# EAGLE board VCF-LM358-Stereo (EAGLE 7.2.0)
Voltage-Controlled Low-Pass Filter using LM358 Dual-Opamp (Stereo) http://electro-music.com/forum/topic-45231-0.html&postdays=0&postorder=asc&highlight=
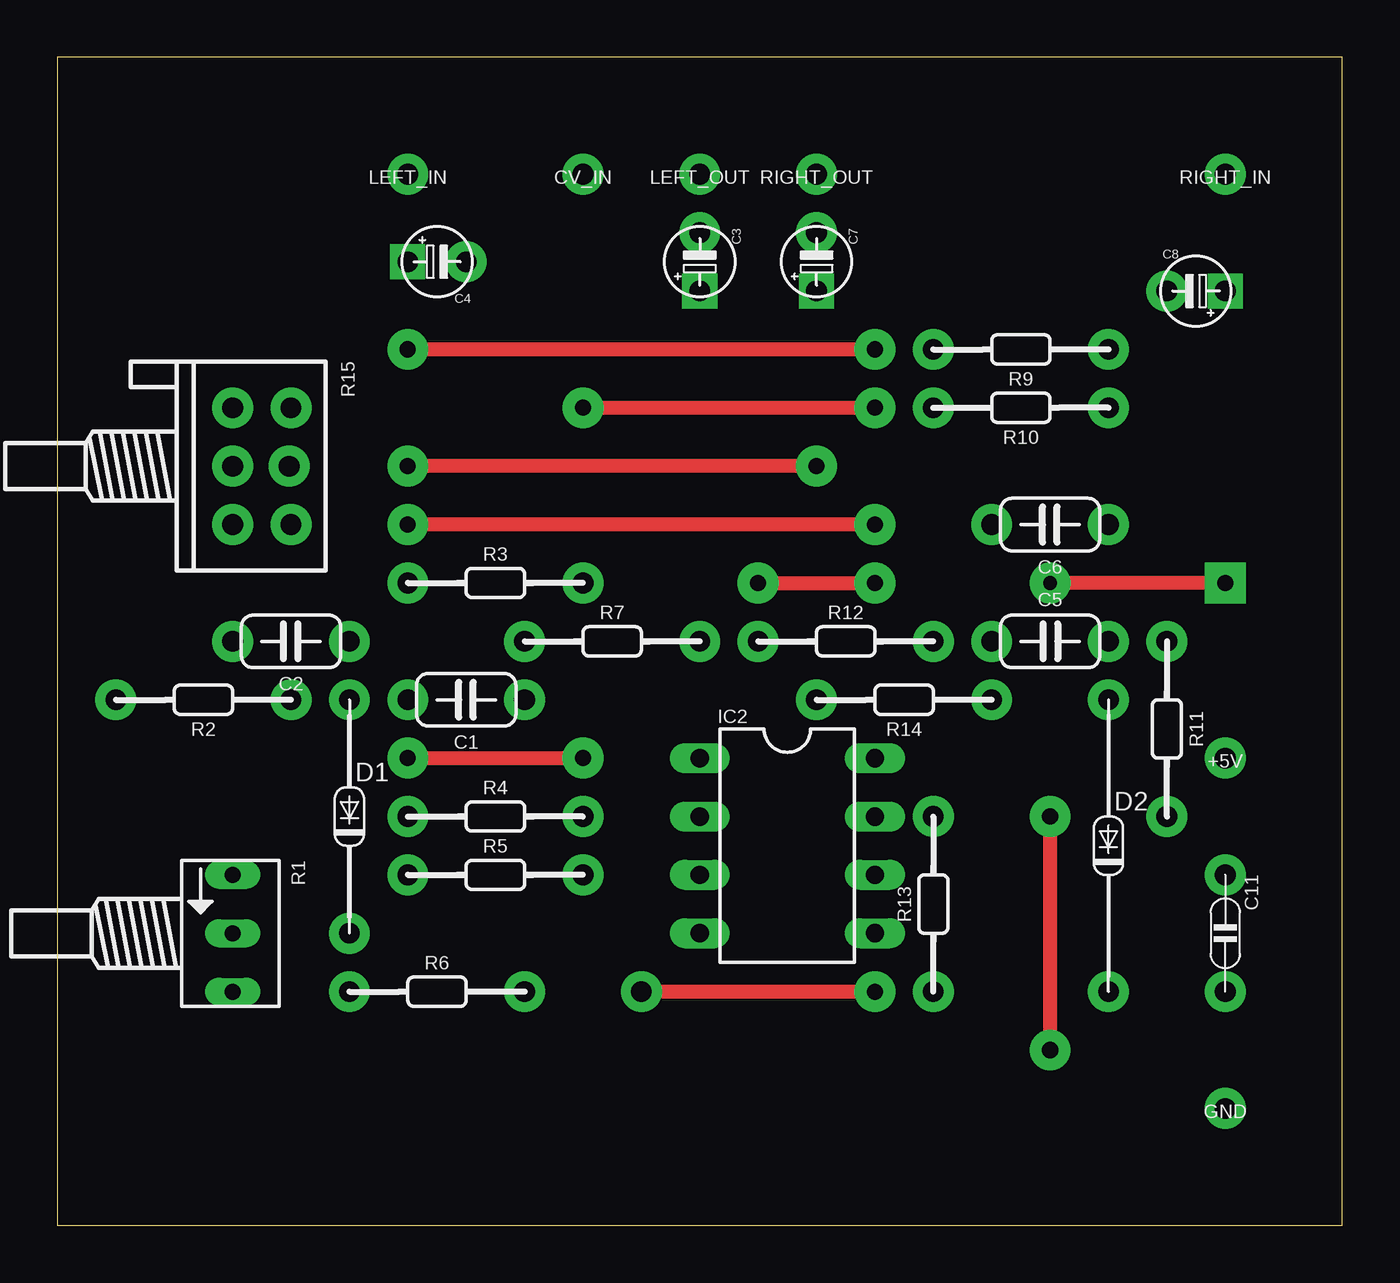
[diagram p0: board, top side]
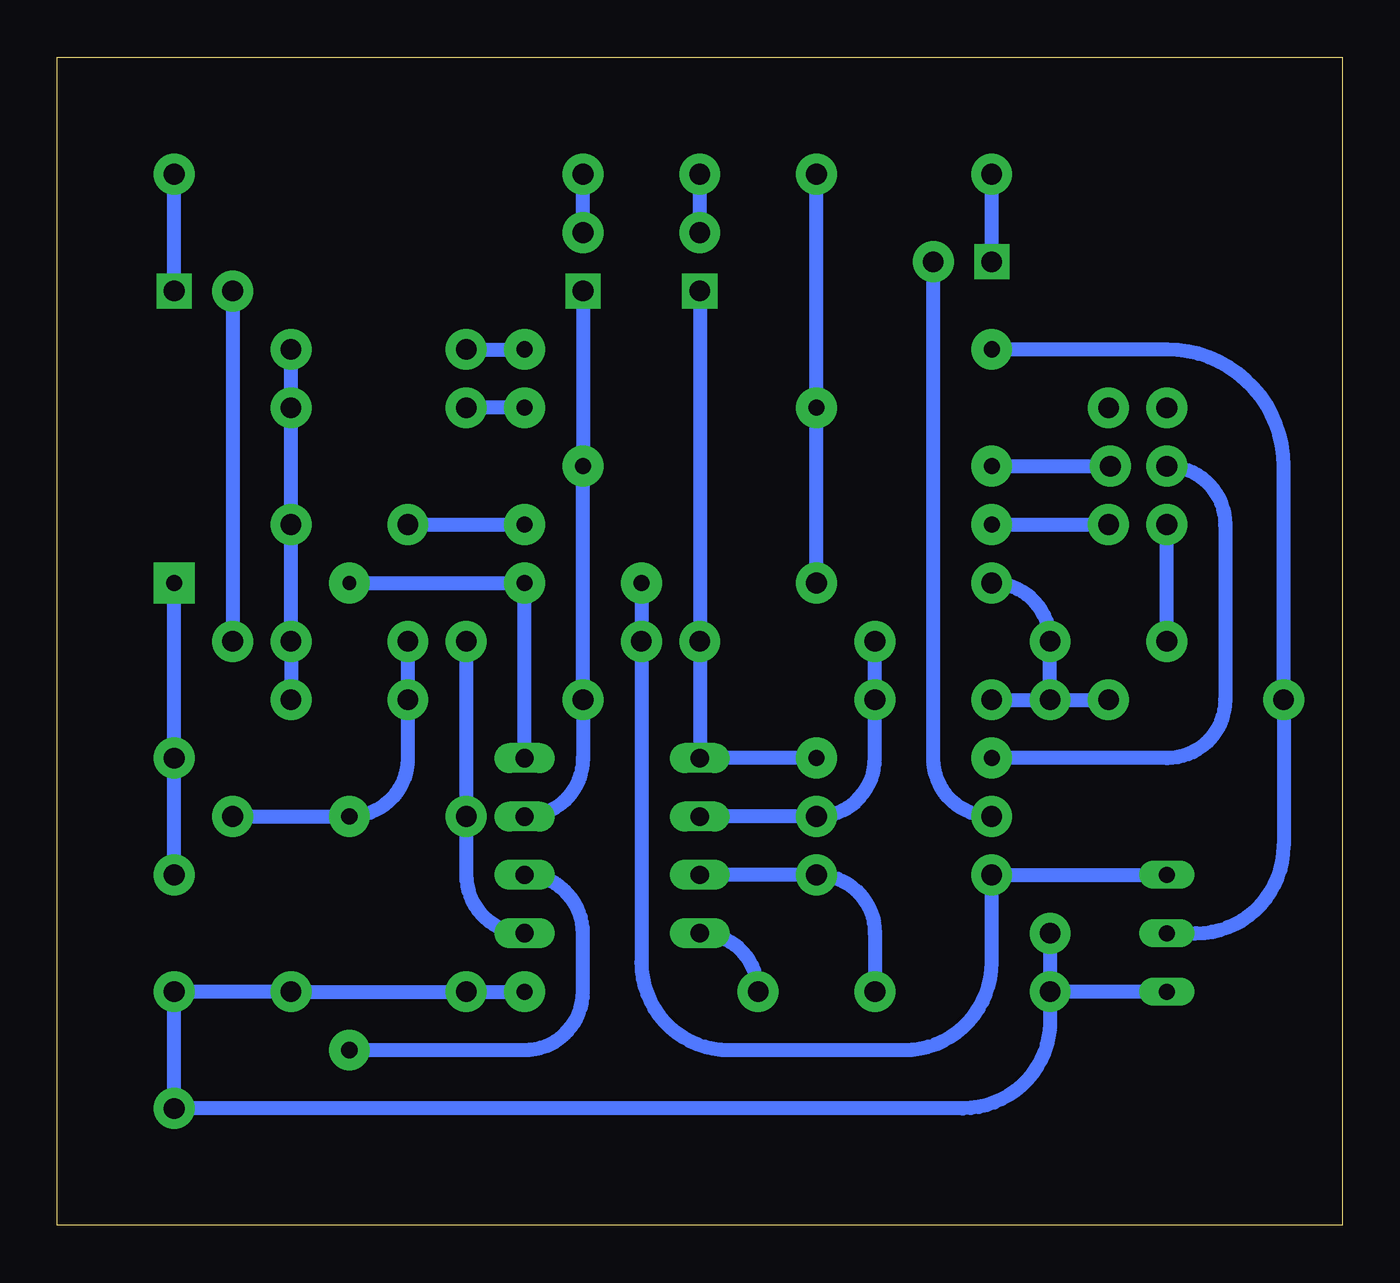
[diagram p1: board, bottom side, seen from below]

Size 55.88 x 50.8 mm. Coordinates in mm from the lower left corner, seen from the top.
Outline: 0,0 55.88,0 55.88,50.8 0,50.8 0,0
Copper layers (1*16): Top 0.035mm / dielectric 1.5mm / Bottom 0.035mm
Design rules "default": minimum track width 10mil, minimum drill 24mil, track to track 8mil, track to pad 8mil, pad to pad 8mil, via to via 8mil, smd to smd 8mil, copper to edge 40mil, drill to drill 8mil, minimum pad ring 10mil, minimum via ring 8mil, stop-mask expansion 4mil, vias tented up to drill 0mil, thermal gap 10mil

## Footprints (pad centres in the part's own frame; a part is rotated, then mirrored left to right if it is on the bottom)
SPAD = drill 0.9 pad 1.778: 1 0,0
C050-024X044 = drill 0.9 pad 1.778: 1 -2.54,0; 2 2.54,0
E2,5-3 = drill 0.9 pad 1.524 square: + -1.27,0 | drill 0.9 pad 1.778: - 1.27,0
C050-020X036 = drill 0.9 pad 1.778: 1 -2.54,0; 2 2.54,0
DO34-10V = drill 0.9 pad 1.778: A 0,5.08; C 0,-5.08
DO34-12V = drill 0.9 pad 1.778: A 0,6.35; C 0,-6.35
DIL08 = drill 0.8 pad 1.27 long: 1 -3.81,3.81; 2 -3.81,1.27; 3 -3.81,-1.27; 4 -3.81,-3.81; 5 3.81,-3.81; 6 3.81,-1.27; 7 3.81,1.27; 8 3.81,3.81
B64Y = drill 0.7 long: A 2.54,0; E -2.54,0; S 0,0
0202/7 = drill 0.9 pad 1.778: 1 -3.81,0; 2 3.81,0
POT-STEREO-2X3 = drill 0.9 pad 1.778: 1-A -2.54,-2.54; 1-E 2.54,-2.54; 1-S 0,-2.54; 2-A -2.54,0; 2-E 2.54,0; 2-S 0,-0.08

## Placement (x,y rotation side)
+5V  VCC  [SPAD]  50.8,20.32 90 top
C1  100nF  [C050-024X044]  17.78,22.86 180 top
C2  100nF  [C050-024X044]  10.16,25.4 180 top
C3  1μF  [E2,5-3]  27.94,41.91 90 top
C4  1μF  [E2,5-3]  16.51,41.91 0 top
C5  100nF  [C050-024X044]  43.18,25.4 0 top
C6  100nF  [C050-024X044]  43.18,30.48 180 top
C7  1μF  [E2,5-3]  33.02,41.91 90 top
C8  1μF  [E2,5-3]  49.53,40.64 180 top
C11  100nF  [C050-020X036]  50.8,12.7 270 top
CV_IN  CV_IN  [SPAD]  22.86,45.72 90 top
D1  1N4148  [DO34-10V]  12.7,17.78 0 top
D2  1N4148  [DO34-12V]  45.72,16.51 0 top
GND  GND  [SPAD]  50.8,5.08 90 top
IC2  LM358N  [DIL08]  31.75,16.51 0 top
LEFT_IN  AUDIO_IN  [SPAD]  15.24,45.72 90 top
LEFT_OUT  AUDIO_OUT  [SPAD]  27.94,45.72 90 top
R1  100kΩ  [B64Y]  7.62,12.7 270 top
R2  1kΩ  [0202/7]  6.35,22.86 180 top
R3  1kΩ  [0202/7]  19.05,27.94 0 top
R4  470kΩ  [0202/7]  19.05,17.78 0 top
R5  100kΩ  [0202/7]  19.05,15.24 0 top
R6  100kΩ  [0202/7]  16.51,10.16 0 top
R7  100kΩ  [0202/7]  24.13,25.4 0 top
R9  1kΩ  [0202/7]  41.91,38.1 180 top
R10  1kΩ  [0202/7]  41.91,35.56 180 top
R11  470kΩ  [0202/7]  48.26,21.59 270 top
R12  100kΩ  [0202/7]  34.29,25.4 0 top
R13  100kΩ  [0202/7]  38.1,13.97 90 top
R14  100kΩ  [0202/7]  36.83,22.86 180 top
R15  [POT-STEREO-2X3]  10.16,33.02 270 top
RIGHT_IN  AUDIO_IN  [SPAD]  50.8,45.72 90 top
RIGHT_OUT  AUDIO_OUT  [SPAD]  33.02,45.72 90 top

## Library data of the parts
+5V CV_IN GND LEFT_IN LEFT_OUT RIGHT_IN RIGHT_OUT = pad
C1-C8 C11 = c
D1 D2 = d
IC2 = ic
R1-R7 R9-R15 = r

## Nets
GND: C11.2 D1.C D2.C GND.1 IC2.4 R1.A R6.1 R13.1
N$1: C4.+ LEFT_IN.1
N$2: C1.1 IC2.2 R4.2 R7.1
N$3: C2.2
N$4: C3.+ IC2.1 R7.2
N$5: R1.S R2.2 R9.2
N$6: C3.- LEFT_OUT.1
N$7: IC2.3 R5.2 R6.2
N$8: CV_IN.1 R3.2 R10.2
N$9: C1.2 C2.1 D1.A R2.1 R3.1
N$10: C4.- R4.1
N$11: C6.2
N$12: C7.+ IC2.7 R14.2
N$13: IC2.5 R12.2 R13.2
N$16: C5.2 C6.1 D2.A R9.1 R10.1
N$17: C5.1 IC2.6 R11.2 R14.1
N$18: C7.- RIGHT_OUT.1
N$19: C8.+ RIGHT_IN.1
N$20: C8.- R11.1
VCC: +5V.1 C11.1 IC2.8 R1.E R5.1 R12.1

## Tracks (layer width: path | path; a pad name or v marks a point on that pad's centre or on a via)
GND  (via drill 0.7 pad 1.78, 0.9 pad 1.78)
  Top 0.61: v35.56,10.16 v25.4,10.16
  Bottom 0.61: v35.56,10.16 R13.1 D2.C C11.2 GND.1 16.51,5.08 arc-90 12.7,8.89 R6.1 | D1.C R6.1 | R1.A R6.1 | v25.4,10.16 arc-90 IC2.4
N$1
  Bottom 0.61: C4.+ LEFT_IN.1
N$2
  Bottom 0.61: IC2.2 R4.2 arc-90 20.32,20.32 C1.1 R7.1
N$3
  Bottom 0.61: C2.2 7.62,30.48
N$4  (via drill 0.7 pad 1.78)
  Top 0.61: v15.24,20.32 v22.86,20.32
  Bottom 0.61: C3.+ R7.2 IC2.1 v22.86,20.32 | 7.62,33.02 arc90 5.08,30.48 5.08,22.86 arc90 7.62,20.32 v15.24,20.32
N$5  (via drill 0.7 pad 1.78)
  Top 0.61: v35.56,38.1 v15.24,38.1
  Bottom 0.61: R1.S 6.35,12.7 arc-90 2.54,16.51 R2.2 2.54,33.02 arc-90 7.62,38.1 v15.24,38.1 | R9.2 v35.56,38.1
N$6
  Bottom 0.61: C3.- LEFT_OUT.1
N$7
  Bottom 0.61: R6.2 20.32,12.7 arc-90 R5.2 IC2.3
N$8  (via drill 0.7 pad 1.78)
  Top 0.61: v22.86,35.56 v35.56,35.56
  Bottom 0.61: v22.86,35.56 R3.2 CV_IN.1 | v35.56,35.56 R10.2
N$9
  Bottom 0.61: C1.2 D1.A | D1.A C2.1 arc-90 R3.1 | D1.A R2.1
N$10
  Bottom 0.61: R4.1 arc90 17.78,20.32 C4.-
N$11  (via drill 0.7 pad 1.78)
  Top 0.61: v35.56,30.48 v15.24,30.48
  Bottom 0.61: C6.2 v35.56,30.48 | v15.24,30.48 10.16,30.48
N$12  (via drill 0.7 pad 1.78)
  Top 0.61: v33.02,33.02 v15.24,33.02
  Bottom 0.61: C7.+ v33.02,33.02 R14.2 33.02,20.32 arc90 IC2.7 | v15.24,33.02 10.16,33.02
N$13
  Bottom 0.61: R12.2 R13.2 38.1,15.24 arc-90 IC2.5
N$16
  Bottom 0.61: D2.A C5.2 C6.1 R10.1 R9.1
N$17  (via drill 0.7 pad 1.78)
  Top 0.61: v43.18,17.78 v43.18,7.62
  Bottom 0.61: R11.2 v43.18,17.78 arc-90 40.64,20.32 R14.1 C5.1 | v43.18,7.62 35.56,7.62 arc-90 33.02,10.16 33.02,12.7 arc-90 IC2.6
N$18
  Bottom 0.61: C7.- RIGHT_OUT.1
N$19
  Bottom 0.61: C8.+ RIGHT_IN.1
N$20
  Bottom 0.61: C8.- R11.1
VCC  (via drill 0.6 pad 1.78, 0.7 pad 1.78)
  Top 0.61: v50.8,27.94 v43.18,27.94 | v30.48,27.94 v35.56,27.94
  Bottom 0.61: R1.E R5.1 15.24,11.43 arc90 19.05,7.62 26.67,7.62 arc90 30.48,11.43 R12.1 v30.48,27.94 | C11.1 +5V.1 v50.8,27.94 | v43.18,27.94 v35.56,27.94 IC2.8